# Altium PCB Mach trai tim.PcbDoc
Units mm, origin at the board's own origin, x right, y up, seen from the top; angles counter-clockwise.
Board outline 100.05 x 83.5 mm, 2 copper layers (Top Layer, Bottom Layer); 28 components, 26 nets, 81 pads, 4 vias.
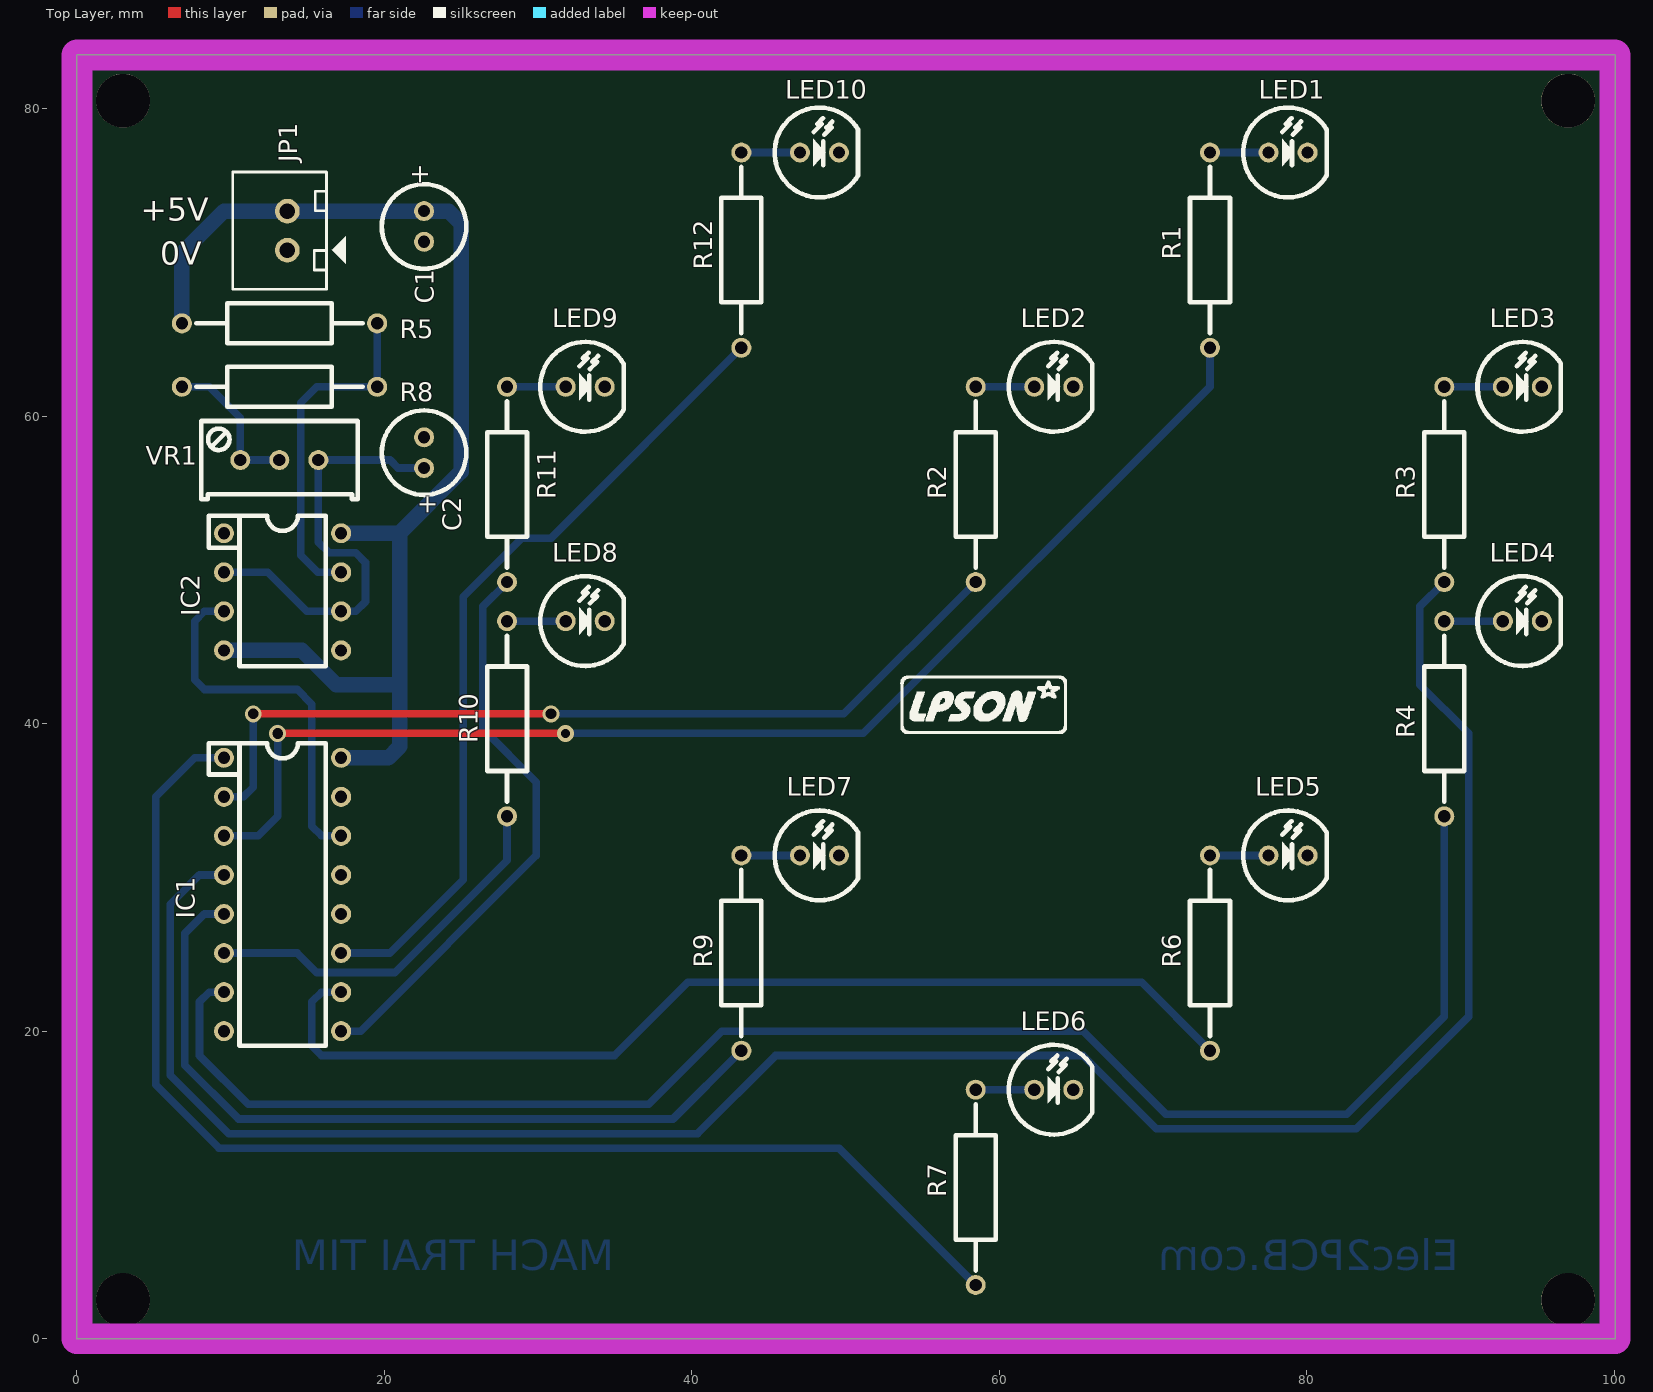
[diagram p0: Top Layer view]
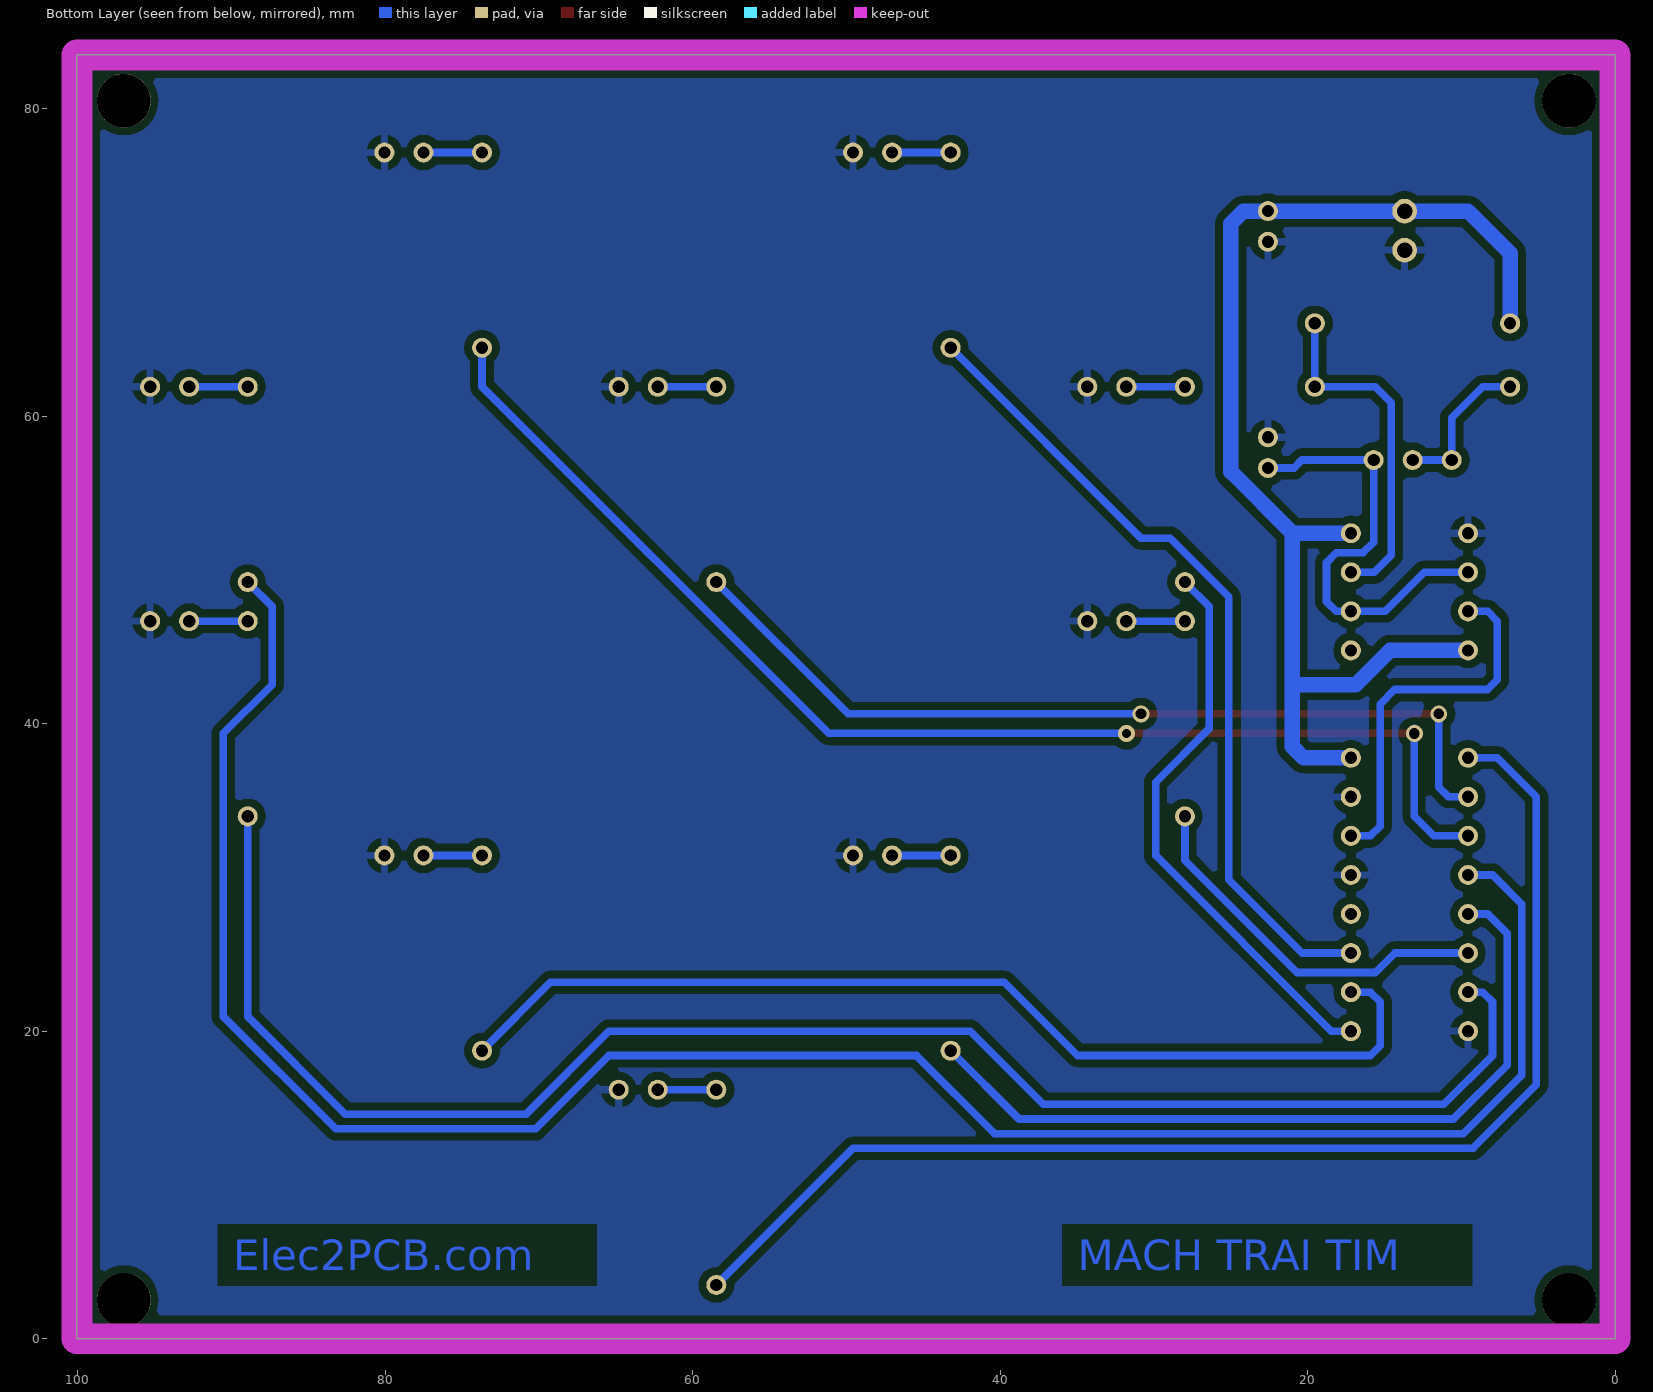
[diagram p1: Bottom Layer view, seen from below]
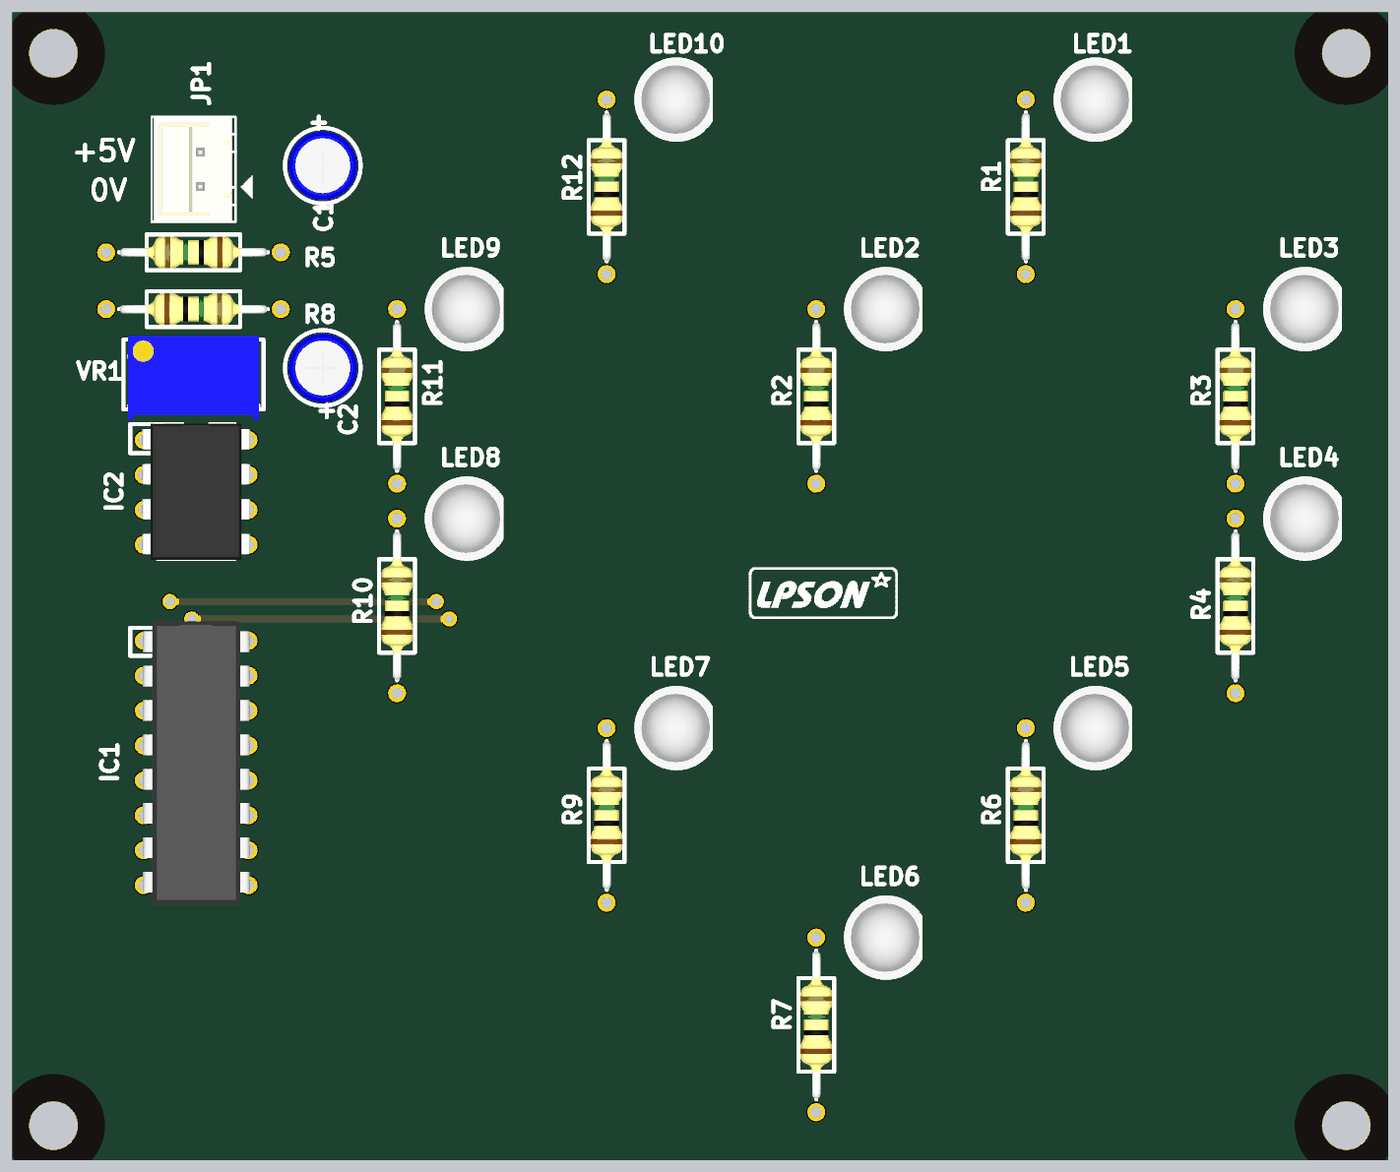
[diagram p2: 3D render of the assembled board from above, using the file's embedded part models]

## Layer stack, top to bottom
Top Solder: solder mask 0.0102, Solder Resist, Dk 3.5
Top Layer: signal copper 0.0356
Dielectric1: dielectric 0.32, FR-4, Dk 4.8
Bottom Layer: signal copper 0.0356
Bottom Solder: solder mask 0.0102, Solder Resist, Dk 3.5

## Board outline
0,0 100.052,0 100.052,83.502 0,83.502

## Design rules (kind name [scope] priority, off if disabled: settings)
Clearance [All] p1: gap=0.5
PlaneConnect [All] p1: planeconnectstyle=Relief reliefexpansion=0.5 reliefentries=4 reliefconductorwidth=0.5 reliefairgap=0.254
PolygonConnect [All] p1: connectstyle=Relief reliefconductorwidth=0.5 reliefentries=4 polygonreliefangle="90 Angle" airgapwidth=0.5
RoutingVias [All] p1: holewidth=0.3 width=0.7 viastyle="Through Hole" minholewidth=0.3 minwidth=0.7 maxholewidth=0.6 maxwidth=1.1
SolderMaskExpansion [All] p1: expansion=0.102
Width [All] p1: maxlimit=1.5 minlimit=0.5 preferedwidth=0.5
29 further rules are at their usual default settings.

## Components (designator, comment, footprint, x,y, rotation, side; value= is the part's Value field where it differs from the comment)
C1 "GSR10M016-0511TAF" CAP_1UF_50V 22.582,73.343 r270 top
C2 "GSR10M016-0511TAF" CAP_1UF_50V 22.582,56.628 r90 top
IC1 "4017" 74HC4017 13.375,28.892 r270 top
IC2 "LM555" LM555 9.565,52.387 r270 top
JP1 "JP2" CON2 13.692,72.072 r90 top
LED1 "LED_R_5" LED5R 77.51,77.153 r0 top
LED2 "LED_R_5" LED5R 62.27,61.912 r0 top
LED3 "LED_R_5" LED5R 92.75,61.912 r0 top
LED4 "LED_R_5" LED5R 92.75,46.672 r0 top
LED5 "LED_R_5" LED5R 77.51,31.432 r0 top
LED6 "LED_R_5" LED5R 62.27,16.192 r0 top
LED7 "LED_R_5" LED5R 47.03,31.432 r0 top
LED8 "LED_R_5" LED5R 31.79,46.672 r0 top
LED9 "LED_R_5" LED5R 31.79,61.912 r0 top
LED10 "LED_R_5" LED5R 47.03,77.153 r0 top
R1 "CF1/4W1KJ25" "RES 1/4W CFR25" 73.7,64.453 r90 top
R2 "CF1/4W1KJ25" "RES 1/4W CFR25" 58.46,49.212 r90 top
R3 "CF1/4W1KJ25" "RES 1/4W CFR25" 88.94,49.212 r90 top
R4 "CF1/4W1KJ25" "RES 1/4W CFR25" 88.94,33.972 r90 top
R5 "CF1/4W1KJ25" "RES 1/4W CFR25" 19.531,66.04 r180 top
R6 "CF1/4W1KJ25" "RES 1/4W CFR25" 73.7,18.732 r90 top
R7 "CF1/4W1KJ25" "RES 1/4W CFR25" 58.46,3.492 r90 top
R8 "CF1/4W1KJ25" "RES 1/4W CFR25" 6.831,61.912 r0 top
R9 "CF1/4W1KJ25" "RES 1/4W CFR25" 43.22,18.732 r90 top
R10 "CF1/4W1KJ25" "RES 1/4W CFR25" 27.98,33.972 r90 top
R11 "CF1/4W1KJ25" "RES 1/4W CFR25" 27.98,49.212 r90 top
R12 "CF1/4W1KJ25" "RES 1/4W CFR25" 43.22,64.453 r90 top
VR1 "10K" VR1 10.628,57.15 r0 top

## Footprints (in the part's own frame and the unit in brackets; to place one, negate y for a bottom-side part, rotate by r counter-clockwise, add the part's x,y. Pads: shape width x height; smd on the part's side, far side on the other; paste and mask are expansions set on the pad)
74HC4017 [mm] "DIP 16, 16 PIN, W 7.62, Pin to pin 2.54MM"
  round 1.3 hole 0.8: 1(-8.89,-3.81) 2(-6.35,-3.81) 3(-3.81,-3.81) 4(-1.27,-3.81) 5(1.27,-3.81) 6(3.81,-3.81) 7(6.35,-3.81) 8(8.89,-3.81) 9(8.89,3.81) 10(6.35,3.81) 11(3.81,3.81) 12(1.27,3.81) 13(-1.27,3.81) 14(-3.81,3.81) 15(-6.35,3.81) 16(-8.89,3.81)
  silkscreen extent -9.84,-4.8 9.84,2.8, body extent -10.3,-3.88 10.3,3.88, height 4.5
CAP_1UF_50V [mm] "Capacitor, Electrolytic, Radial; Body 5 x 11 mm (Dia.xH typ); Pin Spacing 2 mm (typ)"
  round 1.3 hole 0.8: 1(0,0) 2(2,0)
  silkscreen extent -1.75,-2.75 3.75,2.75, body extent -1.53,-2.53 3.53,2.53, height 11.53
CON2 [mm] "CON2"
  round 1.6 hole 1 mask+0.1: 1(-1.27,0) 2(1.27,0)
  silkscreen extent -3.81,-3.8 3.81,3.56, body extent -3.75,-2.29 3.75,3.41, height 7
LED5R [mm] "LED, RED, 2 LEAD, 5mm"
  round 1.3 hole 0.8: 1(0,0) 2(2.54,0)
  silkscreen extent -1.65,-2.92 3.77,2.92, body extent -1.71,-3.01 3.71,3.01, height 12.31
LM555 [mm] "DIP 8, 8 PIN, W 7.62, Pin to pin 2.54MM"
  round 1.3 hole 0.8: 1(0,0) 2(2.54,0) 3(5.08,0) 4(7.62,0) 5(7.62,7.62) 6(5.08,7.62) 7(2.54,7.62) 8(0,7.62)
  silkscreen extent -1.15,-0.99 8.65,6.61, body extent -1.2,-0.1 8.7,7.72, height 4.57
"RES 1/4W CFR25" [mm] "Axial Device, Thru-Hole; 2 Leads fi 0.55"
  round 1.3 hole 0.8 mask+0.1: 1(0,0) 2(12.7,0)
  silkscreen extent 0.94,-1.3 11.76,1.3, body extent 0.97,-1.16 11.74,1.16, height 2.93
VR1 [mm] "Variable Resistor"
  round 1.3 hole 0.8 mask+0.1: 1(0,0) 2(2.54,0) 3(5.08,0)
  silkscreen extent -2.54,-2.54 7.65,2.54, body extent -2.22,-3.3 7.3,2.79, height 11.56

## Part data
C1 C2: "CAP GSR 0511 10uF 16V 20%"
IC1: "Decade Counter/Divider with 10 Decoded Outputs"
IC2: "Timer"
JP1: library part Con2, "Connector 2"
LED1 LED2 LED3 LED4 LED5 LED6 LED7 LED8 LED9 LED10: library part LED_RED_5MM, "LED Red 5mm"
R1 R2 R3 R4 R5 R6 R7 R8 R9 R10 R11 R12: "RES CF AXIAL-0.3 5% 1/4W 1K"
VR1: library part VR2, "Var Resistor"

## Free pads (board coordinates)
  round 3.5 hole 3.5 mask+2: hole1(3,2.52) hole2(97,2.52) hole3(97,80.52) hole4(3,80.52)

## Via types
v1: diameter 1.1, hole 0.7, Top Layer to Bottom Layer, 3 vias
v2: diameter 1.1, hole 0.6, Top Layer to Bottom Layer, 1 vias

## Nets (pads, with @x,y where several pads share a name; then routed paths per layer and width w, separated by ;. In a path a pad name is that pad's centre, name@x,y a point inside that pad or via, vN(x,y) a via of type N, cw(c..) or ccw(c..) an arc to the next point about the centre after c; other vN are vias at no path point)
GND: C1.2 C2.2 IC1.8 IC1.13 IC1.15 IC2.1 JP1.1 LED1.2 LED2.2 LED3.2 LED4.2 LED5.2 LED6.2 LED7.2 LED8.2 LED9.2 LED10.2
NetC2_1: C2.1 IC2.2 IC2.6 VR1.3 | length 29.1
  Bottom Layer w0.5: IC2.2 12.422,49.847 14.962,47.307 IC2.6 18.137,47.307 18.772,47.942 18.772,50.482 18.137,51.117 16.403,51.117 15.708,51.812 VR1.3 20.37,57.15 20.892,56.628 C2.1
NetIC1_1: IC1.1 R7.1 | length 83
  Bottom Layer w0.5: IC1.1 7.66,37.782 5.12,35.242 5.12,16.51 9.247,12.383 49.57,12.383 R7.1
NetIC1_2: IC1.2 R2.1 | length 57.5
  Top Layer w0.5: v1(11.47,40.64) v1(30.837,40.64)
  Bottom Layer w0.5: IC1.2 10.835,35.242 11.47,35.877 v1(11.47,40.64) ; v1(30.837,40.64) 49.887,40.64 R2.1
NetIC1_3: IC1.3 R1.1 | length 82.3
  Top Layer w0.5: v1(13.057,39.37) v2(31.79,39.37)
  Bottom Layer w0.5: IC1.3 11.787,32.703 13.057,33.972 v1(13.057,39.37) v1@13.057,39.688 ; v2(31.79,39.37) 51.157,39.37 73.7,61.912 R1.1
NetIC1_4: IC1.4 R3.1 | length 138.8
  Bottom Layer w0.5: IC1.4 7.977,30.162 6.072,28.258 6.072,17.145 9.882,13.335 40.362,13.335 45.442,18.415 65.445,18.415 70.207,13.652 83.225,13.652 90.527,20.955 90.527,39.37 87.352,42.545 87.352,47.625 R3.1
NetIC1_5: IC1.5 R9.1 | length 51.1
  Bottom Layer w0.5: IC1.5 8.295,27.622 7.025,26.352 7.025,17.78 10.517,14.287 38.775,14.287 R9.1
NetIC1_6: IC1.6 R10.1 | length 24.8
  Bottom Layer w0.5: IC1.6 14.327,25.082 15.597,23.812 20.677,23.812 27.98,31.115 R10.1
NetIC1_7: IC1.7 R4.1 | length 107.5
  Bottom Layer w0.5: IC1.7 8.612,22.543 7.977,21.907 7.977,18.415 11.152,15.24 37.187,15.24 41.95,20.002 65.445,20.002 70.842,14.605 82.59,14.605 88.94,20.955 R4.1
NetIC1_9: IC1.9 R11.1 | length 37.3
  Bottom Layer w0.5: IC1.9 18.455,20.002 29.885,31.432 29.885,36.195 26.392,39.688 26.392,47.625 R11.1
NetIC1_10: IC1.10 R6.1 | length 67.5
  Bottom Layer w0.5: IC1.10 15.915,22.543 15.28,21.907 15.28,19.05 15.915,18.415 34.965,18.415 39.727,23.177 69.255,23.177 R6.1
NetIC1_11: IC1.11 R12.1 | length 53.1
  Bottom Layer w0.5: IC1.11 20.36,25.082 25.122,29.845 25.122,48.26 28.932,52.07 30.837,52.07 R12.1
NetIC1_14: IC1.14 IC2.3 | length 24.4
  Bottom Layer w0.5: IC2.3 8.295,47.307 7.66,46.672 7.66,42.862 8.295,42.227 14.327,42.227 15.28,41.275 15.28,33.337 15.915,32.703 IC1.14
NetIC2_7: IC2.7 R5.1 R8.2 | length 22.5
  Bottom Layer w0.5: IC2.7 15.673,49.847 14.554,50.966 14.554,60.869 15.597,61.912 R8.2 R5.1
NetLED1_1: LED1.1 R1.2 | length 3.8
  Bottom Layer w0.5: R1.2 LED1.1
NetLED2_1: LED2.1 R2.2 | length 3.8
  Bottom Layer w0.5: R2.2 LED2.1
NetLED3_1: LED3.1 R3.2 | length 3.8
  Bottom Layer w0.5: R3.2 LED3.1
NetLED4_1: LED4.1 R4.2 | length 3.8
  Bottom Layer w0.5: R4.2 LED4.1
NetLED5_1: LED5.1 R6.2 | length 3.8
  Bottom Layer w0.5: R6.2 LED5.1
NetLED6_1: LED6.1 R7.2 | length 3.8
  Bottom Layer w0.5: R7.2 LED6.1
NetLED7_1: LED7.1 R9.2 | length 3.8
  Bottom Layer w0.5: R9.2 LED7.1
NetLED8_1: LED8.1 R10.2 | length 3.8
  Bottom Layer w0.5: R10.2 LED8.1
NetLED9_1: LED9.1 R11.2 | length 3.8
  Bottom Layer w0.5: R11.2 LED9.1
NetLED10_1: LED10.1 R12.2 | length 3.8
  Bottom Layer w0.5: R12.2 LED10.1
NetR8_1: R8.1 VR1.1 VR1.2 | length 9.9
  Bottom Layer w0.5: R8.1 8.612,61.912 10.628,59.897 VR1.1 VR1.2
VCC: C1.1 IC1.16 IC2.4 IC2.8 JP1.2 R5.2 | length 80.2
  Bottom Layer w1: R5.2 6.831,70.608 9.565,73.343 JP1.2 C1.1 24.177,73.343 25,72.52 25,56.392 20.995,52.387 ; IC2.4 14.645,44.767 16.867,42.545 21,42.545 ; IC1.16 20.263,37.782 21,38.52 21,42.545 ; IC2.8 20.995,52.387 ; 20.995,52.387 21,52.382 21,42.545
pads on no net: IC1.12 IC2.5

## Polygon pours and split planes (outlines as drawn)
GND on Bottom Layer "Bottom Overlay-No Net" (solid, pour order 5): 0,83.502 99.735,83.502 99.735,0.318 100.052,0 99.735,0.318 0,0.318 0,83.502

## Keep-outs
Keep-Out Layer:
  the board outline again, w2

## Other copper
Bottom Layer:
  text "MACH TRAI TIM" at 34.965,4.445 h2
  text "Elec2PCB.com" at 89.892,4.445 h2

## Silkscreen, mask and mechanical layers (free items; w line width, h text height)
Top Overlay:
  drawing of 892 lines, arcs and shapes, not listed
  text "+5V" at 4.167,72.707 h1.5
  text "0V" at 5.437,69.85 h1.5

## Text inside footprints (layer, text, board x,y; h text height)
C1: Top Overlay "+" at 21.82,76.406 h1.2 r270; Mechanical 1 "+" at 22.083,74.842 h1 r270; Mechanical 1 "1" at 22.083,73.542 h1 r270; Mechanical 1 "2" at 22.083,71.642 h1 r270
C2: Top Overlay "+" at 23.344,53.564 h1.2 r90; Mechanical 1 "+" at 23.082,55.128 h1 r90; Mechanical 1 "1" at 23.082,56.428 h1 r90; Mechanical 1 "2" at 23.082,58.328 h1 r90
IC1: Mechanical 1 "16" at 15.375,38.132 h1 r270; Mechanical 1 "9" at 15.255,20.322 h1 r270; Mechanical 1 "8" at 10.435,20.482 h1 r270; Mechanical 1 "1" at 10.475,38.032 h1 r270
IC2: Mechanical 1 "8" at 15.375,52.737 h1 r270; Mechanical 1 "5" at 15.375,45.137 h1 r270; Mechanical 1 "4" at 10.475,45.137 h1 r270; Mechanical 1 "1" at 10.475,52.637 h1 r270
VR1: Mechanical 1 "1" at 10.488,56.66 h1; Mechanical 1 "2" at 12.868,56.62 h1; Mechanical 1 "3" at 15.398,56.64 h1